# EAGLE board lion (EAGLE 6.5.0)
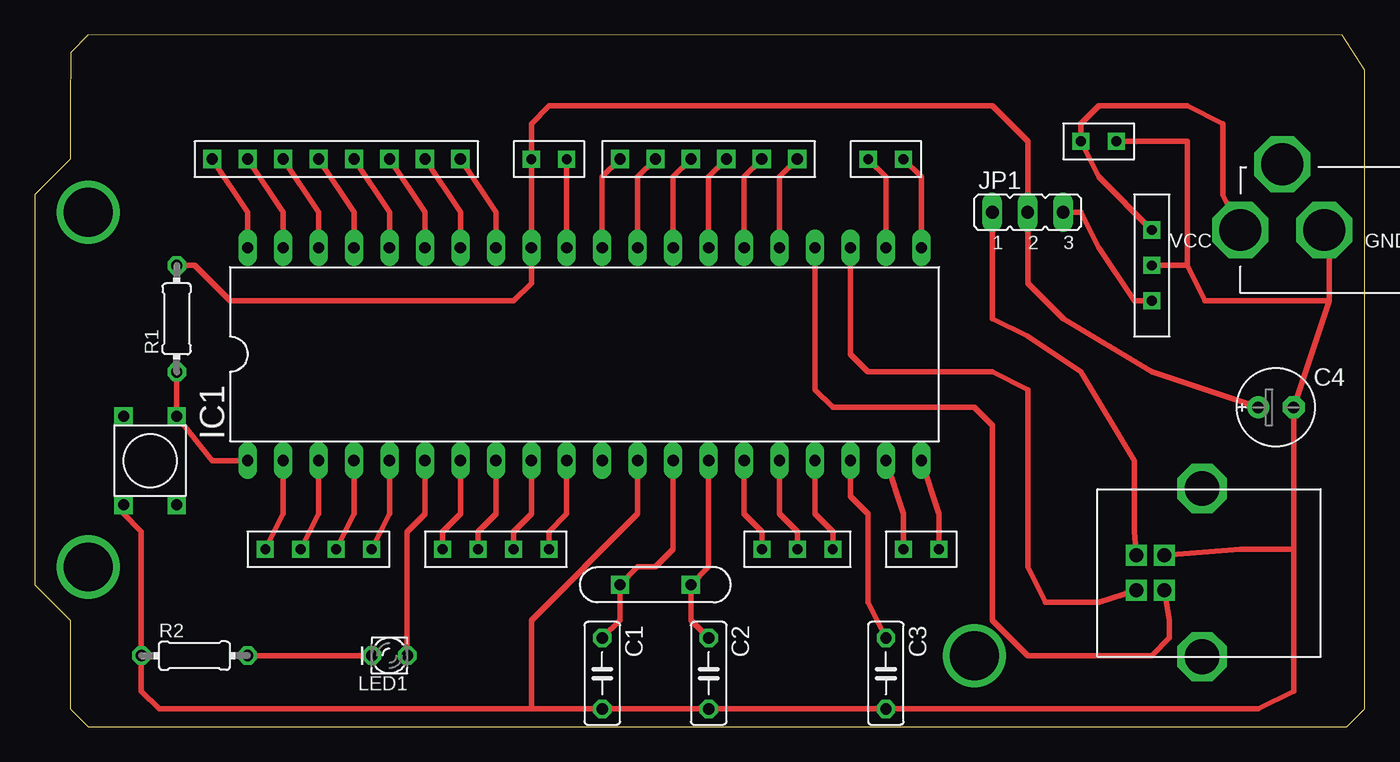
[diagram p0: board, top side]

Size 95.25 x 49.53 mm. Coordinates in mm from the lower left corner, seen from the top.
Outline: 3.81,0 93.98,0 95.25,1.27 95.25,46.99 93.65,49.52 3.81,49.53 2.55,48.25 2.53,44.44 2.54,44.45 2.54,40.64 0,38.1 0,10.16 2.54,7.62 2.54,1.27 3.81,0
Copper layers (1*16): Top 0.035mm / dielectric 1.5mm / Bottom 0.035mm
Design rules "default": minimum track width 10mil, minimum drill 24mil, track to track 8mil, track to pad 8mil, pad to pad 8mil, via to via 8mil, smd to smd 8mil, copper to edge 40mil, drill to drill 8mil, minimum pad ring 10mil, minimum via ring 8mil, stop-mask expansion 4mil, vias tented up to drill 0mil, thermal gap 10mil

## Footprints (pad centres in the part's own frame; a part is rotated, then mirrored left to right if it is on the bottom)
PUSHBTN = drill 0.8 square: P$1 -3.175,-1.905; P$2 -3.175,1.905; P$3 3.175,1.905; P$4 3.175,-1.905
C050-025X075 = drill 0.813 octagon: 1 -2.54,0; 2 2.54,0
E2,5-6E = drill 0.813 pad 1.575: + -1.27,0 | drill 0.813 pad 1.575 octagon: - 1.27,0
DIL40 = drill 0.813 long: 1 -24.13,-7.62; 2 -21.59,-7.62; 3 -19.05,-7.62; 4 -16.51,-7.62; 5 -13.97,-7.62; 6 -11.43,-7.62; 7 -8.89,-7.62; 8 -6.35,-7.62; 9 -3.81,-7.62; 10 -1.27,-7.62; 11 1.27,-7.62; 12 3.81,-7.62; 13 6.35,-7.62; 14 8.89,-7.62; 15 11.43,-7.62; 16 13.97,-7.62; 17 16.51,-7.62; 18 19.05,-7.62; 19 21.59,-7.62; 20 24.13,-7.62; 21 24.13,7.62; 22 21.59,7.62; 23 19.05,7.62; 24 16.51,7.62; 25 13.97,7.62; 26 11.43,7.62; 27 8.89,7.62; 28 6.35,7.62; 29 3.81,7.62; 30 1.27,7.62; 31 -1.27,7.62; 32 -3.81,7.62; 33 -6.35,7.62; 34 -8.89,7.62; 35 -11.43,7.62; 36 -13.97,7.62; 37 -16.51,7.62; 38 -19.05,7.62; 39 -21.59,7.62; 40 -24.13,7.62
9VJACK = drill 3 pad 4 octagon: FIX 3,4.7; GND 6,0; VCC 0,0
JP2 = drill 0.914 long: 1 -2.54,0; 2 0,0; 3 2.54,0
LD260 = drill 0.813 octagon: A -1.27,0; K 1.27,0
0204/7 = drill 0.813 octagon: 1 -3.81,0; 2 3.81,0
USBMINIB = drill 1 pad 1.2 square: D+ 4.77,2.71; D- 4.77,4.71; GND 7.27,2.71; VCC 7.27,4.71 | drill 2.5 pad 2.8 octagon: FIX1 0.013,0; FIX2 12.053,0
CRYSTAL = drill 0.8 square: P$1 -2.54,0; P$2 2.54,0
DUBOX3 = drill 0.711 square: P$1 0,0; P$2 2.54,0; P$3 5.08,0
DUBOX6 = drill 0.8 square: P$1 0,0; P$2 2.54,0; P$3 5.08,0; P$4 7.62,0; P$5 10.16,0; P$6 12.7,0
DUBOX8 = drill 0.8 square: P$1 0,0; P$2 2.54,0; P$3 5.08,0; P$4 7.62,0; P$5 10.16,0; P$6 12.7,0; P$7 15.24,0; P$8 17.78,0
DUBOX2 = drill 0.711 square: P$1 0,0; P$2 2.54,0
DUBOX4 = drill 0.711 square: P$1 0,0; P$2 2.54,0; P$3 5.08,0; P$4 7.62,0
LM7805C = drill 0.711 square: GND 2.54,0; INPUT 0,0; OUTPUT 5.08,0

## Placement (x,y rotation side)
BUTTON1  PUSHBTN  [PUSHBTN]  8.25,19.05 90 top
C1  18pf  [C050-025X075]  40.64,3.81 270 top
C2  18pf  [C050-025X075]  48.26,3.81 270 top
C3  220nf  [C050-025X075]  60.96,3.81 270 top
C4  22uf  [E2,5-6E]  88.9,22.86 0 top
IC1  PIC18F4550_40  [DIL40]  39.37,26.67 0 top
JACK9V  9VJACK  [9VJACK]  86.36,35.56 0 top
JP1  [JP2]  71.12,36.83 0 top
LED1  [LD260]  25.4,5.08 180 top
R1  1k  [0204/7]  10.16,29.21 90 top
R2  1k  [0204/7]  11.43,5.08 0 top
U$1  USBMINIB  [USBMINIB]  83.61,5 90 top
U$2  20 Mhz  [CRYSTAL]  44.45,10.16 0 top
U$3  DUBOX3  [DUBOX3]  52.07,12.7 0 top
U$4  DUBOX6  [DUBOX6]  54.61,40.64 180 top
U$5  DUBOX8  [DUBOX8]  30.48,40.64 180 top
U$6  DUBOX2  [DUBOX2]  62.23,12.7 0 top
U$7  DUBOX2  [DUBOX2]  38.1,40.64 180 top
U$8  DUBOX2  [DUBOX2]  62.23,40.64 180 top
U$9  DUBOX4  [DUBOX4]  16.51,12.7 0 top
U$10  DUBOX4  [DUBOX4]  29.21,12.7 0 top
U$11  LM7805C  [LM7805C]  80.01,35.56 270 top
U$12  DUBOX2  [DUBOX2]  77.47,41.91 180 top

## Library data of the parts
BUTTON1 JACK9V U$1-U$12 = leonino
C1-C4 R1 R2 = resistor
IC1 = microchip; MF: MICROCHIP; MPN: PIC18F4550-I/P; OC_FARNELL: 9321357; OC_NEWARK: 74K8623
JP1 = jumper
LED1 = led

## Nets
+5V: JP1.1 U$1.VCC
GND: BUTTON1.P$2 C1.2 C2.2 C3.2 C4.- IC1.12 JACK9V.GND R2.1 U$1.GND U$11.GND U$12.P$1
N$1: IC1.6 LED1.A
N$2: C3.1 IC1.18
N$3: IC1.24 U$1.D+
N$4: C1.1 IC1.13 U$2.P$1
N$5: C2.1 IC1.14 U$2.P$2
N$6: JACK9V.VCC U$11.INPUT U$12.P$2
N$7: BUTTON1.P$4 IC1.1 R1.1
N$8: IC1.23 U$1.D-
N$10: IC1.2 U$9.P$1
N$11: IC1.3 U$9.P$2
N$12: IC1.4 U$9.P$3
N$13: IC1.19 U$6.P$1
N$14: IC1.5 U$9.P$4
N$15: IC1.7 U$10.P$1
N$16: IC1.8 U$10.P$2
N$17: IC1.9 U$10.P$3
N$18: IC1.10 U$10.P$4
N$19: IC1.40 U$5.P$8
N$20: IC1.39 U$5.P$7
N$21: IC1.38 U$5.P$6
N$22: IC1.37 U$5.P$5
N$23: IC1.36 U$5.P$4
N$24: IC1.35 U$5.P$3
N$25: IC1.34 U$5.P$2
N$26: IC1.33 U$5.P$1
N$27: IC1.30 U$4.P$6
N$28: IC1.29 U$4.P$5
N$29: IC1.28 U$4.P$4
N$30: C4.+ IC1.32 JP1.2 R1.2 U$7.P$2
N$31: IC1.26 U$4.P$2
N$32: IC1.25 U$4.P$1
N$33: IC1.20 U$6.P$2
N$34: IC1.31 U$7.P$1
N$35: IC1.27 U$4.P$3
N$36: IC1.22 U$8.P$2
N$37: IC1.17 U$3.P$3
N$38: IC1.16 U$3.P$2
N$39: IC1.15 U$3.P$1
N$40: IC1.21 U$8.P$1
N$41: JP1.3 U$11.OUTPUT
N$43: LED1.K R2.2
VDD: IC1.11

## Tracks (layer width: path | path; a pad name or v marks a point on that pad's centre or on a via)
+5V
  Top 0.406: JP1.1 68.58,29.21 71.12,27.94 74.93,25.4 78.74,19.05 78.74,13.97 U$1.VCC
GND
  Top 0.406: BUTTON1.P$2 6.35,15.24 7.62,13.97 R2.1 7.62,2.54 8.89,1.27 35.56,1.27 | 35.56,1.27 35.56,7.62 43.18,15.24 IC1.12 | 35.56,1.27 C1.2 C2.2 C3.2 87.63,1.27 90.17,2.54 90.17,12.7 | 92.71,30.48 C4.- 90.17,12.7 | 92.71,30.48 92.71,34.29 JACK9V.GND | 82.55,33.02 U$11.GND | U$12.P$1 82.55,41.91 82.55,33.02 | 92.71,30.48 83.82,30.48 82.55,33.02 | 90.17,12.7 86.36,12.7 U$1.GND
N$1
  Top 0.406: LED1.A 26.67,13.97 27.94,15.24 IC1.6
N$2
  Top 0.406: C3.1 59.69,8.89 59.69,15.24 58.42,16.51 IC1.18
N$3
  Top 0.406: IC1.24 55.88,24.13 57.15,22.86 67.31,22.86 68.58,21.59 68.58,7.62 71.12,5.08 80.01,5.08 81.28,6.35 81.28,7.62 U$1.D+
N$4
  Top 0.406: IC1.13 45.72,12.7 44.45,11.43 43.18,11.43 U$2.P$1 41.91,7.62 C1.1
N$5
  Top 0.406: IC1.14 48.26,11.43 U$2.P$2 46.99,7.62 C2.1
N$6
  Top 0.406: U$11.INPUT 76.2,39.37 U$12.P$2 74.93,43.18 76.2,44.45 82.55,44.45 85.09,43.18 85.09,38.1 JACK9V.VCC
N$7
  Top 0.406: IC1.1 12.7,19.05 BUTTON1.P$4 R1.1
N$8
  Top 0.406: IC1.23 58.42,26.67 59.69,25.4 68.58,25.4 71.12,24.13 71.12,11.43 72.39,8.89 76.2,8.89 U$1.D-
N$10
  Top 0.406: IC1.2 17.78,15.24 U$9.P$1
N$11
  Top 0.406: IC1.3 20.32,15.24 U$9.P$2
N$12
  Top 0.406: IC1.4 22.86,15.24 U$9.P$3
N$13
  Top 0.406: IC1.19 62.23,15.24 U$6.P$1
N$14
  Top 0.406: IC1.5 25.4,15.24 U$9.P$4
N$15
  Top 0.406: IC1.7 30.48,15.24 29.21,13.97 U$10.P$1
N$16
  Top 0.406: IC1.8 33.02,15.24 31.75,13.97 U$10.P$2
N$17
  Top 0.406: IC1.9 35.56,15.24 34.29,13.97 U$10.P$3
N$18
  Top 0.406: IC1.10 38.1,15.24 36.83,13.97 U$10.P$4
N$19
  Top 0.406: U$5.P$8 15.24,36.83 IC1.40
N$20
  Top 0.406: U$5.P$7 17.78,36.83 IC1.39
N$21
  Top 0.406: U$5.P$6 20.32,36.83 IC1.38
N$22
  Top 0.406: U$5.P$5 22.86,36.83 IC1.37
N$23
  Top 0.406: U$5.P$4 25.4,36.83 IC1.36
N$24
  Top 0.406: U$5.P$3 27.94,36.83 IC1.35
N$25
  Top 0.406: U$5.P$2 30.48,36.83 IC1.34
N$26
  Top 0.406: U$5.P$1 33.02,36.83 IC1.33
N$27
  Top 0.406: IC1.30 40.64,39.37 U$4.P$6
N$28
  Top 0.406: IC1.29 43.18,39.37 U$4.P$5
N$29
  Top 0.406: IC1.28 45.72,39.37 U$4.P$4
N$30
  Top 0.406: C4.+ 80.01,25.4 73.66,29.21 71.12,31.75 JP1.2 71.12,41.91 68.58,44.45 36.83,44.45 35.56,43.18 U$7.P$2 IC1.32 35.56,31.75 34.29,30.48 13.97,30.48 11.43,33.02 R1.2
N$31
  Top 0.406: IC1.26 50.8,39.37 U$4.P$2
N$32
  Top 0.406: IC1.25 53.34,39.37 U$4.P$1
N$33
  Top 0.406: IC1.20 64.77,15.24 U$6.P$2
N$34
  Top 0.406: IC1.31 U$7.P$1
N$35
  Top 0.406: IC1.27 48.26,39.37 U$4.P$3
N$36
  Top 0.406: U$8.P$2 60.96,39.37 IC1.22
N$37
  Top 0.406: IC1.17 55.88,15.24 57.15,13.97 U$3.P$3
N$38
  Top 0.406: IC1.16 53.34,15.24 54.61,13.97 U$3.P$2
N$39
  Top 0.406: IC1.15 50.8,15.24 52.07,13.97 U$3.P$1
N$40
  Top 0.406: U$8.P$1 63.5,39.37 IC1.21
N$41
  Top 0.406: JP1.3 74.93,36.83 76.2,34.29 78.74,30.48 U$11.OUTPUT
N$43
  Top 0.406: LED1.K R2.2
N$44  (via drill 3.5 pad 4)
  other vias: 67.31,5.08
N$45  (via drill 3.5 pad 4)
  other vias: 3.81,36.83
N$46  (via drill 3.5 pad 4)
  other vias: 3.81,11.43

## Text on the board
bNames: D7 | D6 | D5 | D4 | D3 | D2 | D1/SCL | D0/SDA | 5V | GND | D0 | D0 | D0 | D0 | D0 | D0 | D0 | D0 | D0 | D0 | D7 | D7 | D7 | D7 | D7 | D7 | D7 | D7 | D7 | D7 | D7 | D7 | D7